# EAGLE board piezo-jfet-buffer-simple-4x-one-sided (EAGLE 7.2.0)
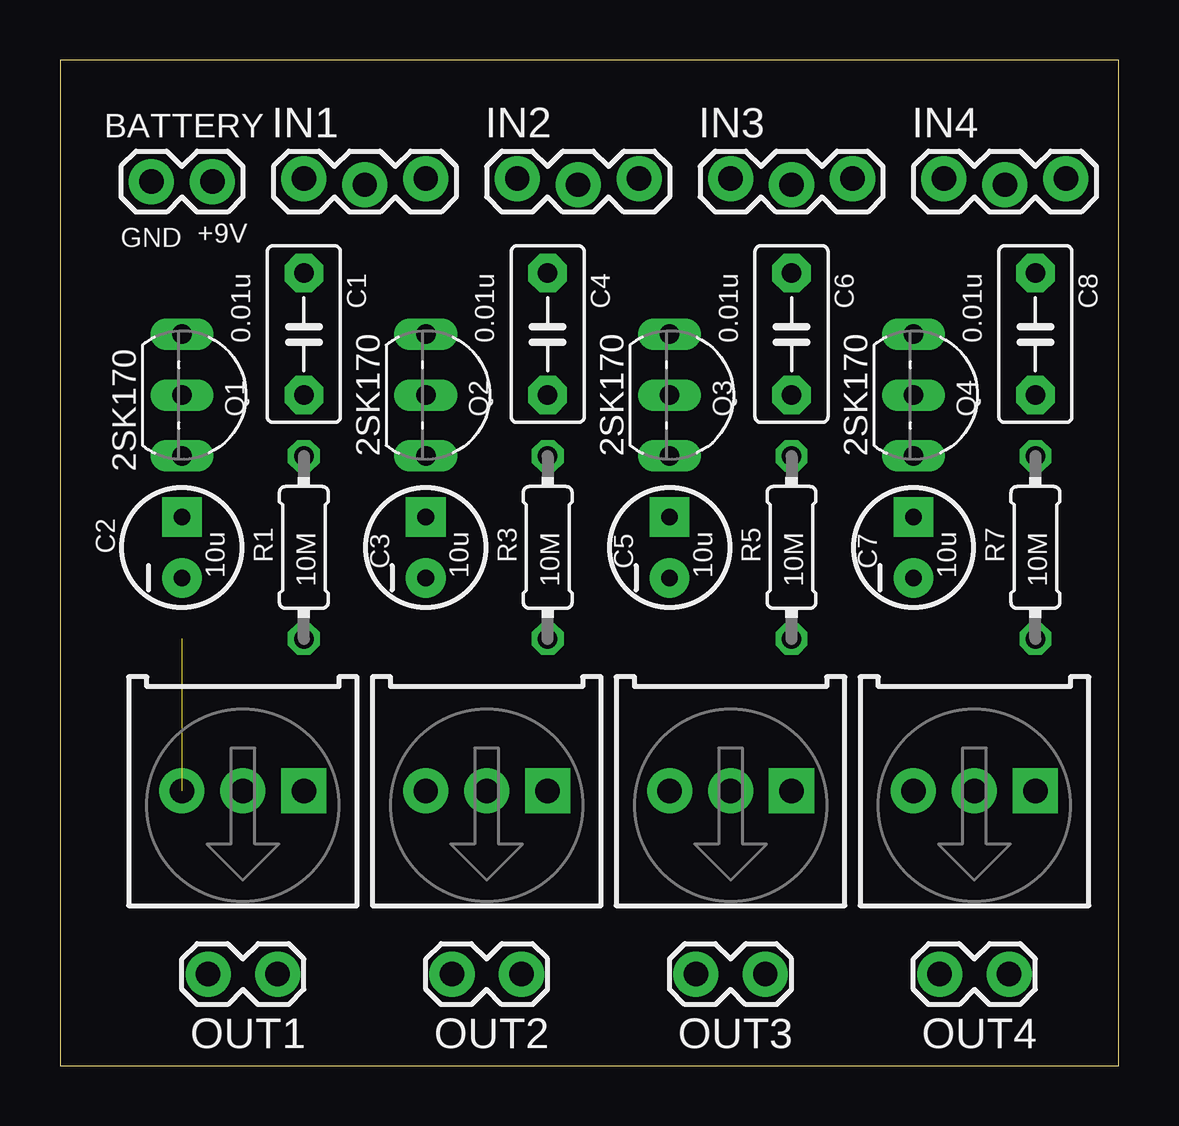
[diagram p0: board, top side]
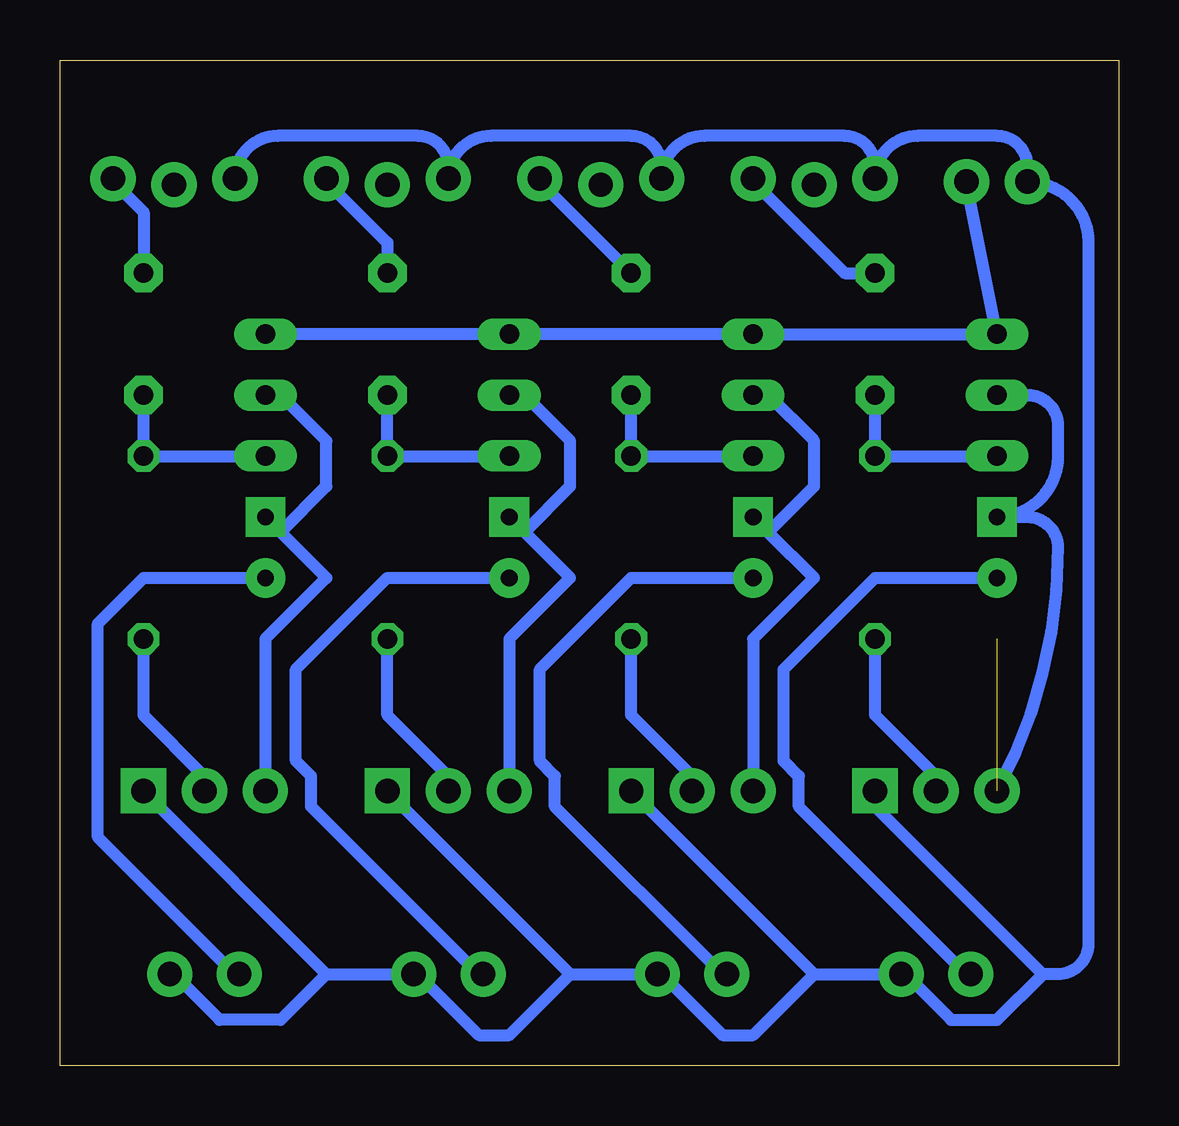
[diagram p1: board, bottom side, seen from below]

Size 44.12 x 41.9 mm. Coordinates in mm from the lower left corner, seen from the top.
Outline: 0,0 44.12,0 44.12,41.9 0,41.9 0,0
Copper layers (1*16): Top 0.035mm / dielectric 1.5mm / Bottom 0.035mm
Design rules "default *": minimum track width 20mil, minimum drill 24mil, track to track 20mil, track to pad 20mil, pad to pad 20mil, via to via 20mil, smd to smd 20mil, copper to edge 40mil, drill to drill 20mil, minimum pad ring 10mil, minimum via ring 8mil, stop-mask expansion 4mil, vias tented up to drill 0mil, thermal gap 10mil

## Footprints (pad centres in the part's own frame; a part is rotated, then mirrored left to right if it is on the bottom)
1X02 = drill 1.016 pad 1.88: 1 0,0; 2 2.54,0
C5B3 = drill 0.813 pad 1.6 octagon: 1 -2.54,0; 2 2.54,0
CPOL-RADIAL-10UF-25V = drill 0.7 pad 1.651 square: 1 1.27,0 | drill 0.7 pad 1.651: 2 -1.27,0
1X03_LOCK = drill 1.016 pad 1.88: 1 0,0.127; 2 2.54,-0.127; 3 5.08,0.127
1X02_LOCK = drill 1.016 pad 1.88: 1 -0.178,0; 2 2.718,0
TO92- = drill 0.813 long: 1 2.54,0; 2 0,0; 3 -2.54,0
0204/7 = drill 0.813 octagon: 1 -3.81,0; 2 3.81,0
3386U = drill 1.016 pad 1.88 square: 1 -2.54,-0.015 | drill 1.016 pad 1.88: 2 0,-0.015; 3 2.54,-0.015

## Placement (x,y rotation side)
BATTERY  [1X02]  3.81,36.83 0 top
C1  0.01u  [C5B3]  10.16,30.48 270 top
C2  10u  [CPOL-RADIAL-10UF-25V]  5.08,21.59 90 top
C3  10u  [CPOL-RADIAL-10UF-25V]  15.24,21.59 90 top
C4  0.01u  [C5B3]  20.32,30.48 270 top
C5  10u  [CPOL-RADIAL-10UF-25V]  25.4,21.59 90 top
C6  0.01u  [C5B3]  30.48,30.48 270 top
C7  10u  [CPOL-RADIAL-10UF-25V]  35.56,21.59 90 top
C8  0.01u  [C5B3]  40.64,30.48 270 top
IN1  [1X03_LOCK]  10.16,36.83 0 top
IN2  [1X03_LOCK]  19.05,36.83 0 top
IN3  [1X03_LOCK]  27.94,36.83 0 top
IN4  [1X03_LOCK]  36.83,36.83 0 top
OUT1  [1X02_LOCK]  8.89,3.81 180 top
OUT2  [1X02_LOCK]  19.05,3.81 180 top
OUT3  [1X02_LOCK]  29.21,3.81 180 top
OUT4  [1X02_LOCK]  39.37,3.81 180 top
Q1  2N5484  [TO92-]  5.08,27.94 270 top
Q2  2N5484  [TO92-]  15.24,27.94 270 top
Q3  2N5484  [TO92-]  25.4,27.94 270 top
Q4  2N5484  [TO92-]  35.56,27.94 270 top
R1  10M  [0204/7]  10.16,21.59 90 top
R2  TRIMPOT-PTH-KNOB  [3386U]  7.62,11.43 180 top
R3  10M  [0204/7]  20.32,21.59 90 top
R4  TRIMPOT-PTH-KNOB  [3386U]  17.78,11.43 180 top
R5  10M  [0204/7]  30.48,21.59 90 top
R6  TRIMPOT-PTH-KNOB  [3386U]  27.94,11.43 180 top
R7  10M  [0204/7]  40.64,21.59 90 top
R8  TRIMPOT-PTH-KNOB  [3386U]  38.1,11.43 180 top

## Library data of the parts
BATTERY IN1-IN4 OUT1-OUT4 = SparkFun-Connectors
C1 C4 C6 C8 = capacitor-wima
C2 C3 C5 C7 = SparkFun-Passives
Q1-Q4 = transistor-fet
R1 R3 R5 R7 = eagle-ltspice; SPICEMODEL: NONE; SPICEPREFIX: R
R2 R4 R6 R8 = SparkFun-Electromechanical

## Nets
CH1: C2.2 OUT1.2
CH2: C3.2 OUT2.2
CH3: C5.2 OUT3.2
CH4: C7.2 OUT4.2
GND: BATTERY.1 IN1.1 IN2.1 IN3.1 IN4.1 OUT1.1 OUT2.1 OUT3.1 OUT4.1 R2.1 R4.1 R6.1 R8.1
JFET-GATE: C1.2 Q1.1 R1.2
JFET-GATE1: C4.2 Q2.1 R3.2
JFET-GATE2: C6.2 Q3.1 R5.2
JFET-GATE3: C8.2 Q4.1 R7.2
JFET-SOURCE: C2.1 Q1.2 R2.3
JFET-SOURCE1: C3.1 Q2.2 R4.3
JFET-SOURCE2: C5.1 Q3.2 R6.3
JFET-SOURCE3: C7.1 Q4.2 R8.3
N$1: C1.1 IN1.3
N$2: C4.1 IN2.3
N$3: R1.1 R2.2
N$4: R3.1 R4.2
N$5: C6.1 IN3.3
N$6: R5.1 R6.2
N$7: C8.1 IN4.3
N$8: R7.1 R8.2
V+: BATTERY.2 Q1.3 Q2.3 Q3.3 Q4.3

## Tracks (layer width: path | path; a pad name or v marks a point on that pad's centre or on a via)
CH1
  Bottom 0.508: C2.2 10.16,20.32 13.97,16.51 13.97,12.7 13.34,12.06 13.34,10.79 6.35,3.81 OUT1.2
CH2
  Bottom 0.508: C3.2 20.32,20.32 24.13,16.51 24.13,12.7 23.5,12.06 23.5,10.79 16.51,3.81 OUT2.2
CH3
  Bottom 0.508: C5.2 30.48,20.32 34.29,16.51 34.29,12.7 33.66,12.06 33.66,10.79 26.67,3.81 OUT3.2
CH4
  Bottom 0.508: C7.2 40.64,20.32 42.55,18.41 42.55,9.53 36.83,3.81 OUT4.2
GND
  Bottom 0.508: 12.7,3.81 OUT1.1 8.89,3.81 6.99,1.91 5.08,1.91 3.17,3.81 | 12.7,3.81 20.32,11.43 R4.1 | R2.1 10.16,10.79 3.17,3.81 | 22.86,3.81 OUT2.1 19.05,3.81 16.51,1.27 15.24,1.27 12.7,3.81 | 22.86,3.81 30.48,11.43 R6.1 | 33.02,3.81 OUT3.1 29.21,3.81 26.67,1.27 25.4,1.27 22.86,3.81 | 33.02,3.81 40.64,11.43 R8.1 | 33.02,3.81 34.92,1.91 37.47,1.91 39.37,3.81 OUT4.1 | 10.16,36.83 IN1.1 | IN4.1 arc90 35.05,38.73 29.21,38.73 arc90 27.94,37.47 IN3.1 arc90 26.16,38.73 20.32,38.73 arc90 19.05,37.47 IN2.1 arc90 17.27,38.73 11.43,38.73 arc90 10.16,37.47 IN1.1 | 3.17,3.81 2.54,3.81 arc-90 1.27,5.08 1.27,34.29 arc-90 BATTERY.1 3.81,37.47 arc-90 5.08,38.73 8.38,38.73 arc-90 IN1.1
JFET-GATE
  Bottom 0.508: Q1.1 R1.2 C1.2
JFET-GATE1
  Bottom 0.508: Q2.1 R3.2 C4.2
JFET-GATE2
  Bottom 0.508: Q3.1 R5.2 C6.2
JFET-GATE3
  Bottom 0.508: Q4.1 R7.2 C8.2
JFET-SOURCE  (1 unrouted)
  Bottom 0.508: Q1.2 3.81,27.94 arc90 2.54,26.67 2.54,25.4 arc90 C2.1 3.81,22.86 arc90 2.54,21.59 arc28 R2.3
JFET-SOURCE1
  Bottom 0.508: Q2.2 14.61,27.94 12.7,26.04 12.7,24.13 14.61,22.23 | R4.3 15.24,17.78 12.7,20.32 14.61,22.23 | 14.61,22.23 C3.1
JFET-SOURCE2
  Bottom 0.508: Q3.2 24.77,27.94 22.86,26.04 22.86,24.13 24.77,22.23 | R6.3 25.4,17.78 22.86,20.32 24.77,22.23 | 24.77,22.23 C5.1
JFET-SOURCE3
  Bottom 0.508: Q4.2 34.92,27.94 33.02,26.04 33.02,24.13 34.92,22.23 | R8.3 35.56,17.78 33.02,20.32 34.92,22.23 | 34.92,22.23 C7.1
N$1
  Bottom 0.508: C1.1 11.43,33.02 15.24,36.83 IN1.3
N$2
  Bottom 0.508: C4.1 24.13,36.83 IN2.3
N$3
  Bottom 0.508: R1.1 10.16,14.61 7.62,12.06 R2.2
N$4
  Bottom 0.508: R3.1 20.32,14.61 17.78,12.06 R4.2
N$5
  Bottom 0.508: C6.1 30.48,34.29 33.02,36.83 IN3.3
N$6
  Bottom 0.508: R5.1 30.48,14.61 27.94,12.06 R6.2
N$7
  Bottom 0.508: C8.1 40.64,35.56 41.91,36.83 IN4.3
N$8
  Bottom 0.508: R7.1 40.64,14.61 38.1,12.06 R8.2
V+
  Bottom 0.508: Q4.3 Q3.3 Q2.3 Q1.3 BATTERY.2

## Text on the board
tNames: GND | +9V | 2SK170 | 2SK170 | 2SK170 | 2SK170